# Altium PCB PCB_Deck - Crazyflie V2.pcbdoc
Units mm, origin at the board's own origin, x right, y up, seen from the top; angles counter-clockwise.
Board outline 25.4 x 25.4 mm, 2 copper layers (Top Layer, Bottom Layer); 4 components, 4 nets, 36 pads, 4 vias.
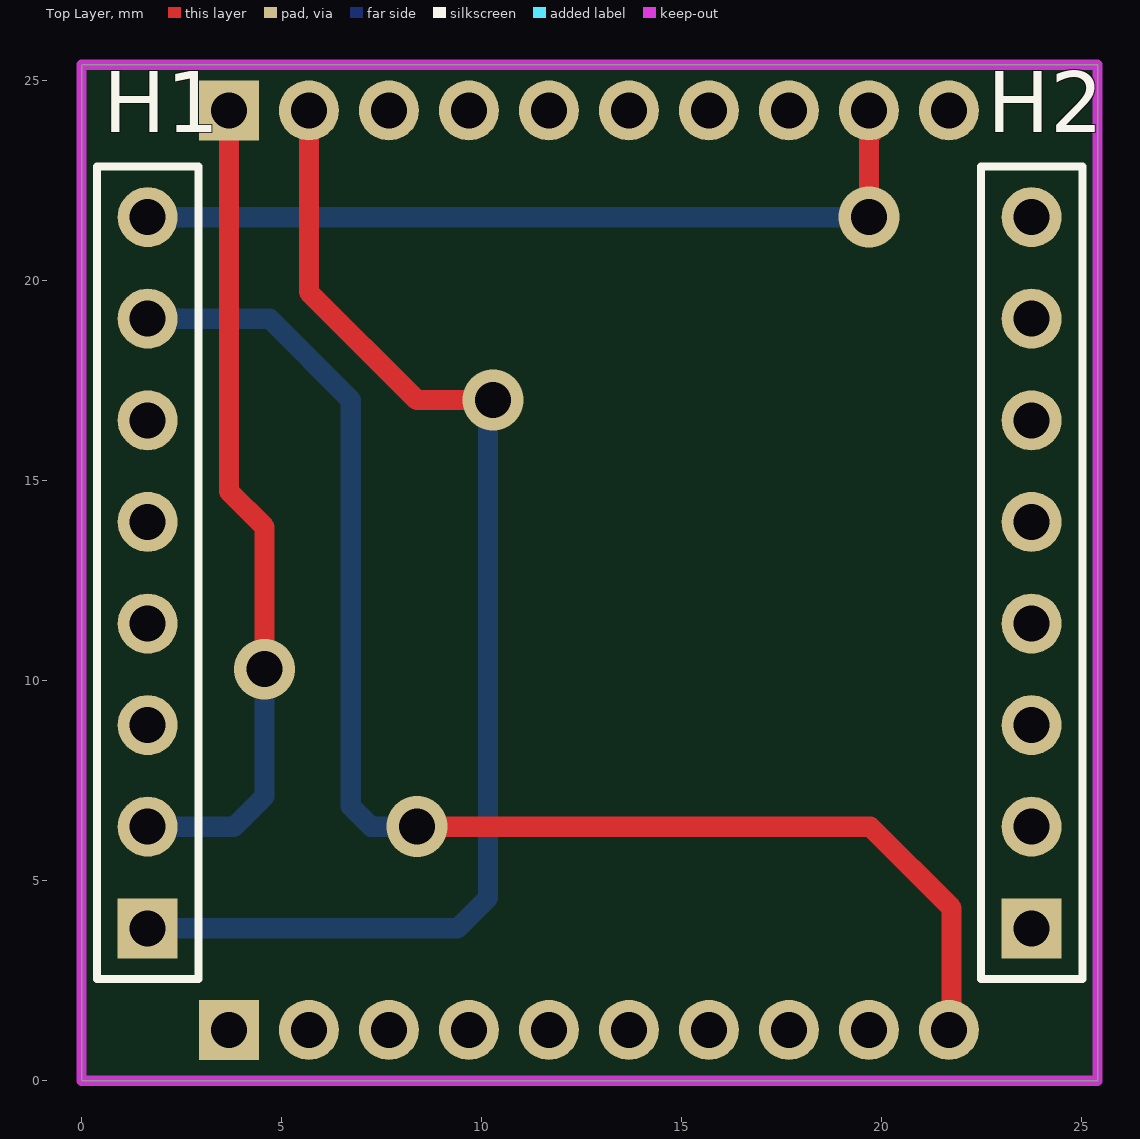
[diagram p0: Top Layer view]
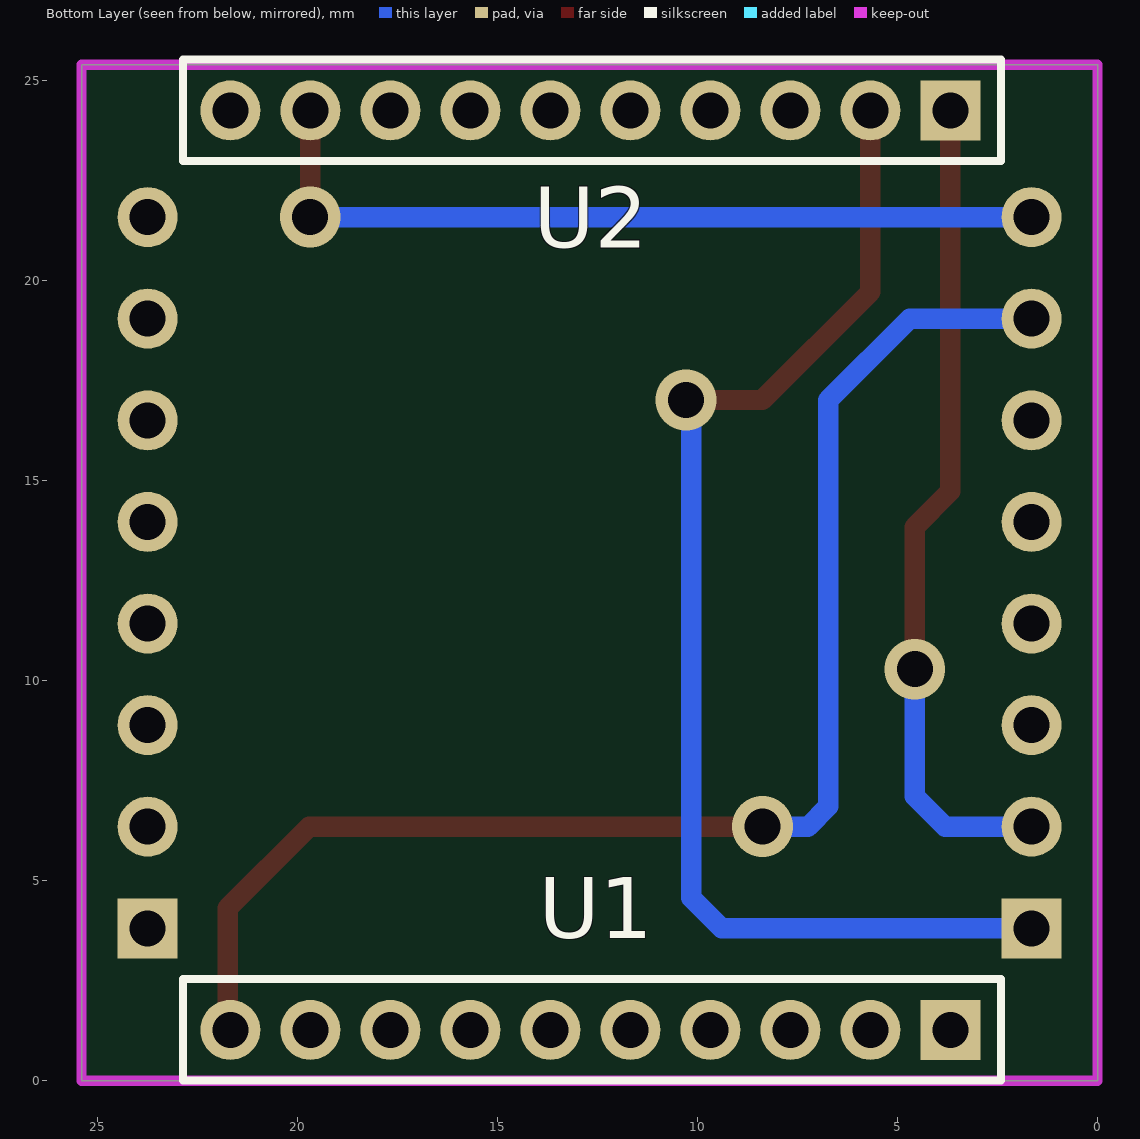
[diagram p1: Bottom Layer view, seen from below]

## Layer stack, top to bottom
Top Solder: solder mask 0.0102, Solder Resist, Dk 3.5
Top Layer: signal copper 0.0356
Dielectric 1: dielectric 0.32, FR-4, Dk 4.8
Bottom Layer: signal copper 0.0356
Bottom Solder: solder mask 0.0102, Solder Resist, Dk 3.5

## Board outline
0,0 25.4,0 25.4,25.4 0,25.4

## Design rules (kind name [scope] priority, off if disabled: settings)
Clearance [All] p1: gap=0.254 ignorepadtopadclearanceinfootprint=FALSE except(0: Arc-Hole Track-Hole SMDPad-Hole THPad-Hole Via-Hole Fill-Hole Poly-Hole Region-Hole Text-Hole)
PolygonConnect [All] p1: connectstyle=Relief reliefconductorwidth=0.254 reliefentries=4 polygonreliefangle="90 Angle" airgapwidth=0.254
RoutingVias [All] p1: holewidth=0.711 width=1.27 viastyle="Through Hole" minholewidth=0.711 minwidth=1.27 maxholewidth=0.711 maxwidth=1.27
SolderMaskExpansion [All] p1: expansion=0.102
Width [All] p1: maxlimit=0.508 minlimit=0.254 preferedwidth=0.254 minimp=50.000000 maximp=50.000000 favimp=50.000000
30 further rules are at their usual default settings.

## Components (designator, comment, footprint, x,y, rotation, side; value= is the part's Value field where it differs from the comment)
H1 "ESP - LEFT SIDE" HDR1X8 1.651,3.81 r90 top
H2 "ESP - RIGHT SIDE" HDR1X8 23.749,3.81 r90 top
U1 "DRON - LEFT SIDE" HDR1X10 3.683,1.27 r0 bottom
U2 "DRON - RIGH SIDE" HDR1X10 3.683,24.257 r0 bottom

## Footprints (in the part's own frame and the unit in brackets; to place one, negate y for a bottom-side part, rotate by r counter-clockwise, add the part's x,y. Pads: shape width x height; smd on the part's side, far side on the other; paste and mask are expansions set on the pad)
HDR1X8 [mm] "Connector; Header; 8 Position"
  rect 1.5x1.5 hole 0.9: 1(0,0)
  round 1.5 hole 0.9: 2(2.54,0) 3(5.08,0) 4(7.62,0) 5(10.16,0) 6(12.7,0) 7(15.24,0) 8(17.78,0)
  silkscreen extent -1.27,-1.27 19.05,1.27
HDR1X10 [mm] "Connector; Header; 10 Position"
  rect 1.5x1.5 hole 0.9: 1(0,0)
  round 1.5 hole 0.9: 2(2,0) 3(4,0) 4(6,0) 5(8,0) 6(10,0) 7(12,0) 8(14,0) 9(16,0) 10(18,0)
  silkscreen extent -1.27,-1.27 19.18,1.27

## Part data
H1 H2: BOM_JLCPCB Part Class="Extended Part", BOM_Manufacturer=DEALON(???), BOM_Manufacturer Part=DZ254R-11-08-63, BOM_Supplier=LCSC, BOM_Supplier Part=C2935914, Contributor=LCSC, spicePre=H, spiceSymbolName=DZ254R-11-08-63
U1 U2: BOM_JLCPCB Part Class="Extended Part", BOM_Manufacturer=???, BOM_Manufacturer Part=2543U-110CNG1SNT01, BOM_Supplier=LCSC, BOM_Supplier Part=C350282, Contributor=LCSC, spicePre=U, spiceSymbolName=2543U-110CNG1SNT01

## Via types
v1: diameter 1.524, hole 0.9, Top Layer to Bottom Layer, 4 vias

## Nets (pads, with @x,y where several pads share a name; then routed paths per layer and width w, separated by ;. In a path a pad name is that pad's centre, name@x,y a point inside that pad or via, vN(x,y) a via of type N, cw(c..) or ccw(c..) an arc to the next point about the centre after c; other vN are vias at no path point)
GND: H1.7 U1.10 | length 35.2
  Top Layer w0.254: U1.10 U1.10@21.747,1.334
  Top Layer w0.508: v1(8.382,6.35) 19.715,6.35 21.747,4.318 U1.10@21.747,1.334
  Bottom Layer w0.508: H1.7 4.699,19.05 6.731,17.018 6.731,6.858 7.239,6.35 v1(8.382,6.35)
NetH1_1: H1.1 U2.2 | length 31.6
  Top Layer w0.508: U2.2 5.683,19.717 8.382,17.018 v1(10.287,17.018)
  Bottom Layer w0.508: H1.1 9.398,3.81 10.16,4.572 10.16,16.891 v1(10.287,17.018)
NetH1_2: H1.2 U2.1 | length 20.7
  Top Layer w0.508: U2.1 3.683,14.732 4.572,13.843 v1(4.572,10.287)
  Bottom Layer w0.508: H1.2 3.81,6.35 4.572,7.112 v1(4.572,10.287)
NetH1_8: H1.8 U2.9 | length 21.2
  Top Layer w0.508: U2.9@19.683,24.13 19.556,24.003 19.812,23.747 19.685,23.62 v1(19.685,21.59)
  Bottom Layer w0.254: H1.8@1.27,21.336 1.397,21.463 H1.8@1.524,21.336
  Bottom Layer w0.508: H1.8@1.651,21.463 1.778,21.59 v1(19.685,21.59)
pads on no net: H1.3 H1.4 H1.5 H1.6 H2.1 H2.2 H2.3 H2.4 H2.5 H2.6 H2.7 H2.8 U1.1 U1.2 U1.3 U1.4 U1.5 U1.6 U1.7 U1.8 U1.9 U2.3 U2.4 U2.5 U2.6 U2.7 U2.8 U2.10

## Keep-outs
Keep-Out Layer:
  the board outline again, w0.254